# Altium PCB Copy of PCB1.PcbDoc
Units mm, origin at the board's own origin, x right, y up, seen from the top; angles counter-clockwise.
Board outline 50.75 x 50.5 mm, 4 copper layers (Top Layer, GND_t, GND_b, Bottom Layer), stack 0.442 mm thick; 80 components, 55 nets, 305 pads, 9 vias.
Unrouted connection lines stored in the file: 97.
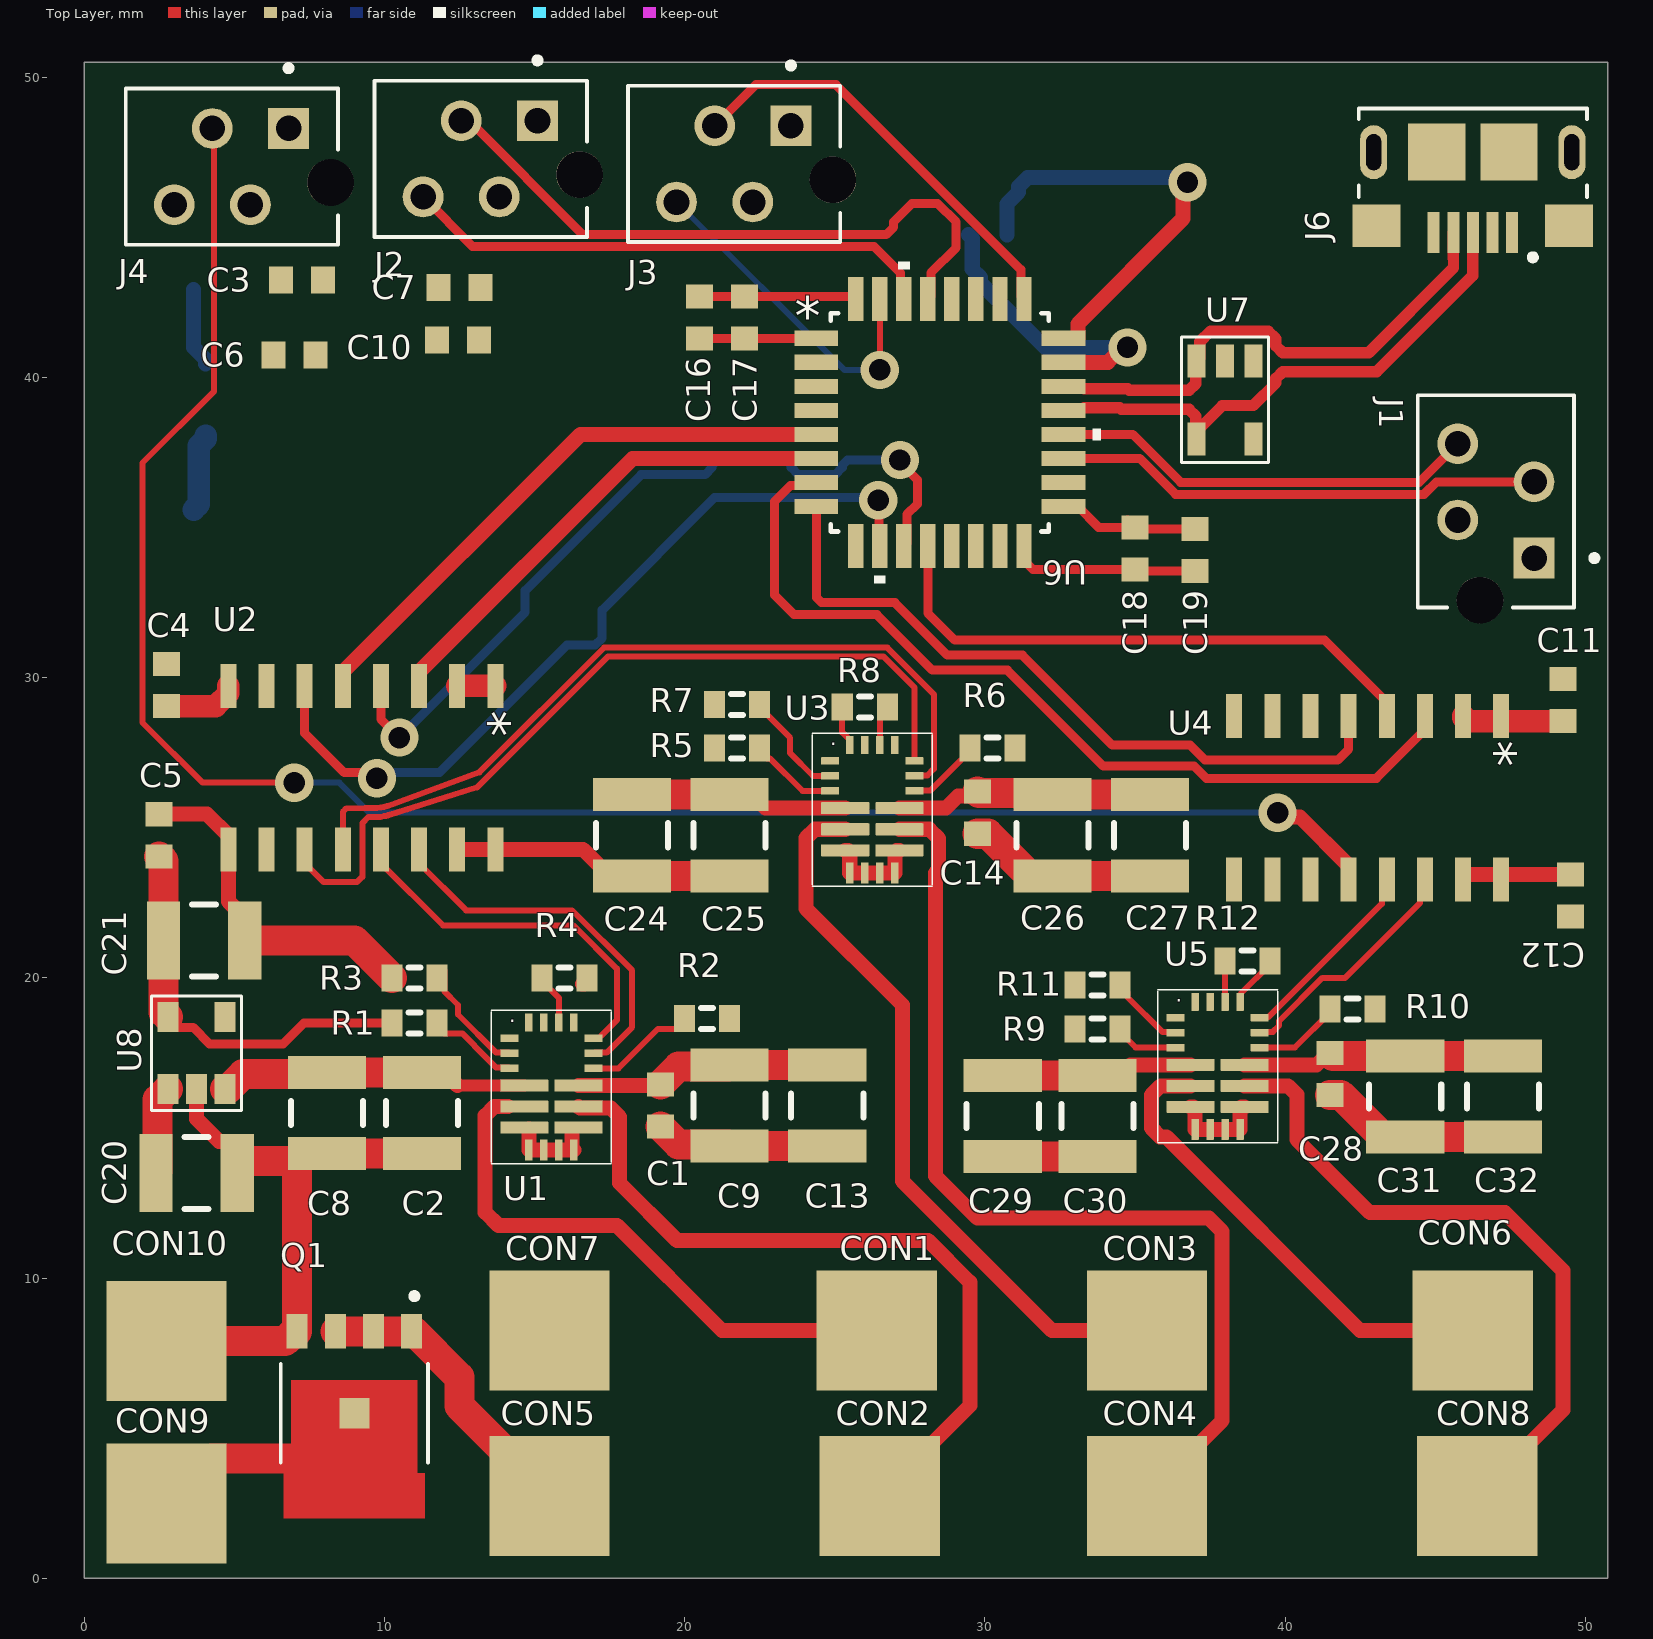
[diagram p0: Top Layer view]
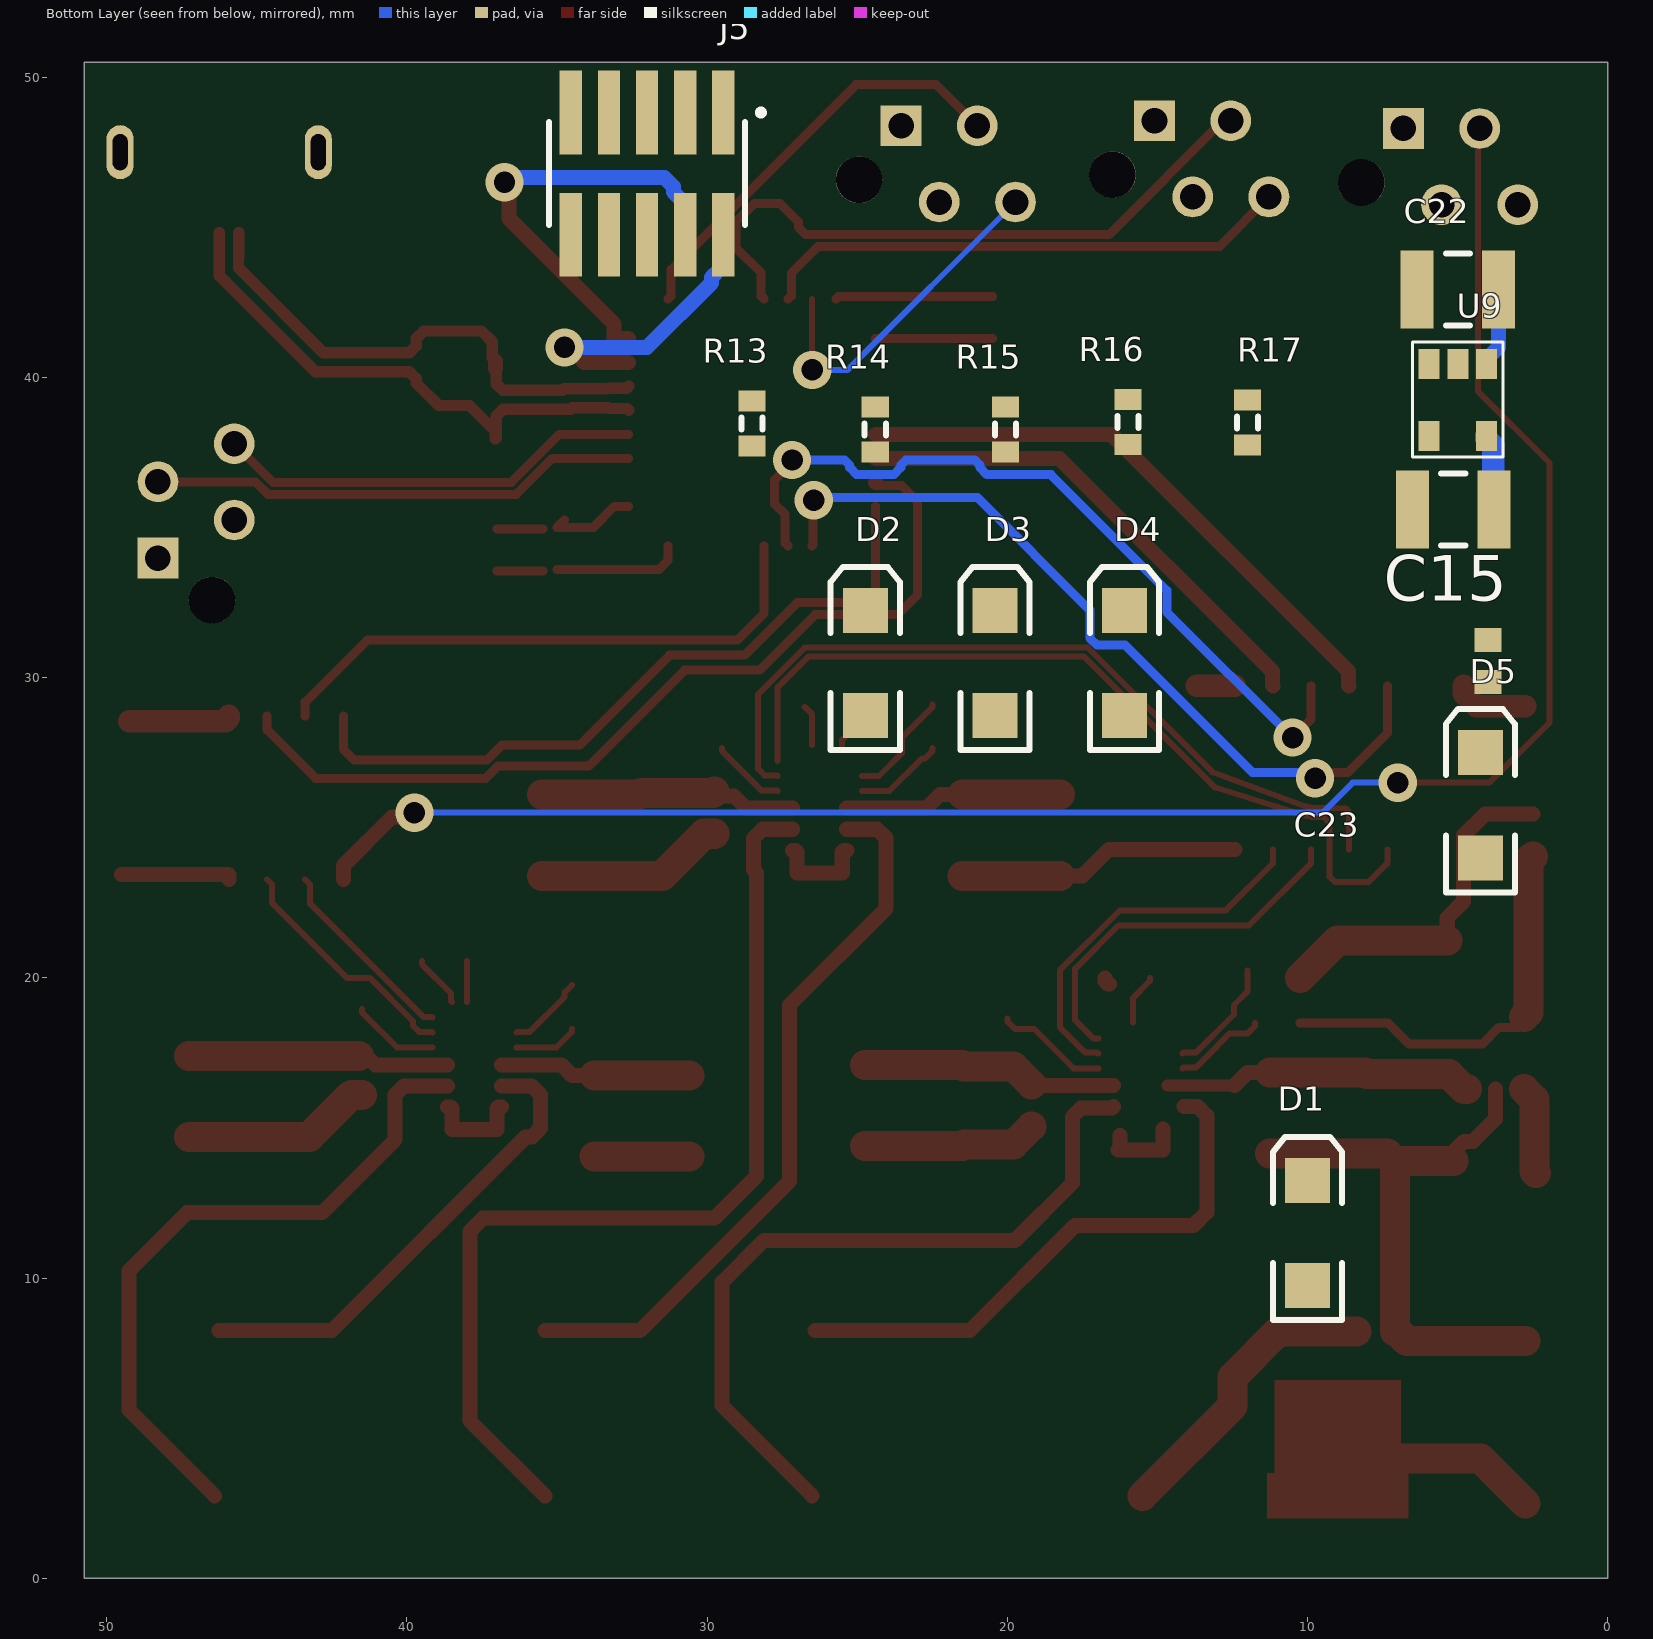
[diagram p1: Bottom Layer view, seen from below]

## Layer stack, top to bottom
Top Solder: solder mask 0.0102, Solder Resist, Dk 3.5
Top Layer: signal copper 0.035
Dielectric 2: prepreg 0.1, PP-006, Dk 4.1
GND_t: signal copper 0.035
Dielectric 1: core 0.1016, Core-009, Dk 4.5
GND_b: signal copper 0.035
Dielectric 3: prepreg 0.1, PP-006, Dk 4.1
Bottom Layer: signal copper 0.035
Bottom Solder: solder mask 0.0102, Solder Resist, Dk 3.5

## Board outline
0,0 50.75,0 50.75,50.5 0,50.5

## Design rules (kind name [scope] priority, off if disabled: settings)
Clearance [All] p1: gap=0.254 ignorepadtopadclearanceinfootprint=FALSE except(0: Arc-Hole Track-Hole SMDPad-Hole THPad-Hole Via-Hole Fill-Hole Poly-Hole Region-Hole Text-Hole; 0.1: Arc-Arc Arc-Track Track-Track; 0.127: SMDPad-SMDPad)
DiffPairsRouting [All] p1: maxlimit=0.254 minlimit=0.254 mostfreqgap=0.254 toplayer_minwidth=0.381 toplayer_maxwidth=0.381 toplayer_prefwidth=0.381 midlayer1_minwidth=0.381 midlayer1_maxwidth=0.381 midlayer1_prefwidth=0.381 midlayer2_minwidth=0.381 midlayer2_maxwidth=0.381 midlayer2_prefwidth=0.381 bottomlayer_minwidth=0.381 bottomlayer_maxwidth=0.381 bottomlayer_prefwidth=0.381 maxuncoupledlength=12.7
PolygonConnect [All] p1: connectstyle=Relief reliefconductorwidth=0.254 reliefentries=4 polygonreliefangle="90 Angle" airgapwidth=0.254
RoutingVias [All] p1: holewidth=0.711 width=1.27 viastyle="Through Hole" minholewidth=0.711 minwidth=1.27 maxholewidth=0.711 maxwidth=1.27
SolderMaskExpansion [All] p1: expansion=0.102 istentingtop=FALSE
Width [All] p1: maxlimit=1 minlimit=0.1 preferedwidth=0.254
29 further rules are at their usual default settings.

## Classes and differential pairs
differential pair class diff_USB: USB_D
component class Motorcontroller: C1 C2 C3 C4 C5 C6 C7 C8 C9 C10 C11 C12 C13 C14 C24 C25 C26 C27 C28 C29 C30 C31 C32 CON1 CON2 CON3 CON4 CON5 CON6 CON7 CON8 J1 J2 J3 J4 R1 R2 R3 R4 R5 R6 R7 R8 R9 R10 R11 R12 U1 U2 U3 U4 U5
component class Mainboard: C15 C16 C17 C18 C19 C20 C21 C22 C23 CON9 CON10 D1 D2 D3 D4 D5 J5 J6 Q1 R13 R14 R15 R16 R17 U6 U7 U8 U9
differential pair USB_D: +USB_D_P -USB_D_N

## Components (designator, comment, footprint, x,y, rotation, side; value= is the part's Value field where it differs from the comment)
C1 "Cap Semi" 1608[0603] 19.196,15.75 r90 top value=100nF
C2 "Cap Semi" C1210 11.25,15.5 r90 top value=10uF
C3 "Cap Semi" 1608[0603] 7.25,43.25 r0 top value=100nF
C4 "Cap Semi" 1608[0603] 2.75,29.75 r90 top value=100nF
C5 "Cap Semi" 1608[0603] 2.5,24.75 r270 top value=100nF
C6 "Cap Semi" 1608[0603] 7,40.75 r0 top value=100nF
C7 "Cap Semi" 1608[0603] 12.5,43 r0 top value=100nF
C8 "Cap Semi" C1210 8.096,15.5 r90 top value=10uF
C9 "Cap Semi" C1210 21.5,15.75 r90 top value=10uF
C10 "Cap Semi" 1608[0603] 12.45,41.25 r180 top value=100nF
C11 "Cap Semi" 1608[0603] 49.25,29.25 r90 top value=100nF
C12 "Cap Semi" 1608[0603] 49.5,22.75 r270 top value=100nF
C13 "Cap Semi" C1210 24.75,15.75 r90 top value=10uF
C14 "Cap Semi" 1608[0603] 29.75,25.5 r90 top value=100nF
C15 "Cap Semi" 1608[0603] 4,30.554 r90 bottom value=100pF
C16 "Cap Semi" 1608[0603] 20.5,42 r270 top value=1uF
C17 "Cap Semi" 1608[0603] 22,42 r270 top value=10nF
C18 "Cap Semi" 1608[0603] 35,34.3 r90 top value=100nF
C19 "Cap Semi" 1608[0603] 37,34.25 r90 top value=100nF
C20 "Cap Semi" C1210 3.75,13.5 r180 top value=10uF
C21 "Cap Semi" C1210 4,21.25 r180 top value=10uF
C22 "Cap Semi" C1210 5,42.929 r180 bottom value=10uF
C23 "Cap Semi" C1210 5.15,35.596 r180 bottom value=10uF
C24 "Cap Semi" C1210 18.25,24.75 r90 top value=10uF
C25 "Cap Semi" C1210 21.5,24.75 r90 top value=10uF
C26 "Cap Semi" C1210 32.25,24.75 r90 top value=10uF
C27 "Cap Semi" C1210 35.5,24.75 r90 top value=10uF
C28 "Cap Semi" 1608[0603] 41.5,16.805 r90 top value=100nF
C29 "Cap Semi" C1210 30.596,15.4 r90 top value=10uF
C30 "Cap Semi" C1210 33.75,15.4 r90 top value=10uF
C31 "Cap Semi" C1210 44,16.055 r90 top value=10uF
C32 "Cap Semi" C1210 47.25,16.055 r90 top value=10uF
CON1 "Moter1 +" con_soldering 26.5,8.25 r0 top
CON2 "Motor1 -" con_soldering 26.6,2.75 r0 top
CON3 "Motor2 +" con_soldering 35.5,8.25 r0 top
CON4 "Motor2 -" con_soldering 35.5,2.75 r0 top
CON5 "Thrower +" con_soldering 15.6,2.75 r0 top
CON6 "Motor3 +" con_soldering 46.35,8.25 r0 top
CON7 "Thrower -" con_soldering 15.6,8.25 r0 top
CON8 "Motor3 -" con_soldering 46.5,2.75 r0 top
CON9 "BAT+" con_soldering 2.85,2.5 r0 top
CON10 "BAT-" con_soldering 2.75,8 r90 top
D1 "RED" 3.2X1.6X1.1 10,11.5 r90 bottom
D2 "RED" 3.2X1.6X1.1 24.733,30.485 r90 bottom
D3 "RED" 3.2X1.6X1.1 20.415,30.485 r90 bottom
D4 "RED" 3.2X1.6X1.1 16.097,30.485 r90 bottom
D5 "RED" 3.2X1.6X1.1 4.25,25.75 r90 bottom
J1 "Encoder_1" TE_7-215079-4 48.29,33.98 r270 top
J2 "Encoder_2" TE_7-215079-4 15.1,48.55 r0 top
J3 "Encoder_3" TE_7-215079-4 23.54,48.38 r0 top
J4 "PWM_thrower" TE_7-215079-4 6.81,48.29 r0 top
J5 "FTSH-105-XX-X-DV" SAMTEC_FTSH-105-XX-X-DV 32,46.785 r0 bottom
J6 "10118193-0001LF" FCI_10118193-0001LF 46.25,47.5 r180 top
Q1 "BUK6Y10-30P" TRANS_PSMN5R5-60YS,115 9,5.5 r270 top
R1 "Res3" J1-0603 11,18.5 r180 top value=10K
R2 "Res3" J1-0603 20.75,18.654 r0 top value=10K
R3 "Res3" J1-0603 11,20 r180 top value=3.3K
R4 "Res3" J1-0603 16,20 r0 top value=100K
R5 "Res3" J1-0603 21.75,27.654 r180 top value=10K
R6 "Res3" J1-0603 30.25,27.654 r0 top value=10K
R7 "Res3" J1-0603 21.75,29.109 r180 top value=3.3K
R8 "Res3" J1-0603 26,29.029 r180 top value=100K
R9 "Res3" J1-0603 33.75,18.305 r180 top value=10K
R10 "Res3" J1-0603 42.25,18.959 r0 top value=10K
R11 "Res3" J1-0603 33.75,19.759 r180 top value=3.3K
R12 "Res3" J1-0603 38.75,20.555 r0 top value=100K
R13 "Res3" J1-0603 28.5,38.465 r90 bottom value=15K
R14 "Res3" J1-0603 24.401,38.267 r90 bottom value=15K
R15 "Res3" J1-0603 20.063,38.267 r90 bottom value=3.9K
R16 "Res3" J1-0603 15.975,38.517 r90 bottom value=3.9K
R17 "Res3" J1-0603 12,38.5 r90 bottom value=2.2K
U1 "PDRV8243HRXYQ1" DRV8243_motor_driver 15.563,16.364 r0 top
U2 "MAX14930AASE+" 21-0041_S16+1_MXM 9.25,27 r270 top
U3 "PDRV8243HRXYQ1" DRV8243_motor_driver 26.25,25.6 r0 top
U4 "MAX14930AASE+" 21-0041_S16+1_MXM 42.75,26 r270 top
U5 "PDRV8243HRXYQ1" DRV8243_motor_driver 37.75,17.055 r0 top
U6 "STM32G441KBT6" LQFP-32 28.5,38.5 r0 top
U7 "CM1223_ESD" CM1223_ESD 38,39.25 r180 top
U8 "NCV8730" NCP164CSN330T1G_Voltage_regulator 3.75,17.5 r180 top
U9 "NCP164" NCP164CSN330T1G_Voltage_regulator 5,39.25 r180 bottom

## Footprints (in the part's own frame and the unit in brackets; to place one, negate y for a bottom-side part, rotate by r counter-clockwise, add the part's x,y. Pads: shape width x height; smd on the part's side, far side on the other; paste and mask are expansions set on the pad)
3.2X1.6X1.1 [mm] "SMT LED; 2 Flat Leads"
  rect 1.5x1.5 smd: 1(-1.75,0) 2(1.75,0)
  silkscreen extent -2.9,-1.15 3.2,1.15
21-0041_S16+1_MXM [mm]
  rect 1.456x0.533 smd paste+0 mask+0: 1(-2.722,4.445) 2(-2.722,3.175) 3(-2.722,1.905) 4(-2.722,0.635) 5(-2.722,-0.635) 6(-2.722,-1.905) 7(-2.722,-3.175) 8(-2.722,-4.445) 9(2.722,-4.445) 10(2.722,-3.175) 11(2.722,-1.905) 12(2.722,-0.635) 13(2.722,0.635) 14(2.722,1.905) 15(2.722,3.175) 16(2.722,4.445)
  body extent -3.1,-4.95 3.1,4.95, height 1.76
1608[0603] [mm] "Chip Capacitor, Body 1.6x0.8mm, IPC High Density"
  rect 0.8x0.9 smd: 1(-0.7,0) 2(0.7,0)
  body extent -0.87,-0.48 0.87,0.48, height 1.3
C1210 [mm] "Chip Capacitor, Body 3.2x2.5mm, IPC High Density"
  rect 1.1x2.6 smd: 1(-1.35,0) 2(1.35,0)
  silkscreen extent -0.4,-1.2 0.4,1.2, body extent -1.7,-1.35 1.7,1.35, height 1.3
CM1223_ESD [mm]
  rect 0.6x1.1 smd: 1(-0.95,-1.3) 2(0,-1.3) 3(0.95,-1.3) 4(0.95,1.3) 5(-0.95,1.3)
  silkscreen extent -1.45,-2.1 1.45,2.08
con_soldering [mm]
  rect 4x4 smd: 1(-0.1,0)
DRV8243_motor_driver [mm]
  rrect10% 0.6x0.25 smd: 1(-1.4,1.625) 2(-1.4,1.125) 3(-1.4,0.625) 8(1.4,0.625) 9(1.4,1.125) 10(1.4,1.625)
  rrect10% 1.6x0.4 smd: 4(-0.9,0.05) 4(0.9,0.05) 5(-0.9,-0.65) 6(-0.9,-1.35) 6(0.9,-1.35) 7(0.9,-0.65)
  rrect10% 0.25x0.7 smd: 6(-0.75,-2.1) 6(-0.25,-2.1) 6(0.25,-2.1) 6(0.75,-2.1)
  rrect10% 0.25x0.6 smd: 11(0.75,2.15) 12(0.25,2.15) 13(-0.25,2.15) 14(-0.75,2.15)
  silkscreen extent -2,-2.55 2,2.55
FCI_10118193-0001LF [mm]
  rect 0.4x1.35 smd: 1(-1.3,2.675) 2(-0.65,2.675) 3(0,2.675) 4(0.65,2.675) 5(1.3,2.675)
  rect 1.6x1.4 smd: S1(-3.2,2.45) S2(3.2,2.45)
  rect 1.9x1.9 smd: S3(1.2,0) S4(-1.2,0)
  oval 0.9x1.8 hole 0.5 slot 1.2 at 90 deg: S5(-3.3,0) S6(3.3,0)
  round 0.5 hole 0.5 unplated: ""(-3.3,0) ""(3.3,0)
  silkscreen extent -3.8,-1.45 3.8,3.6
J1-0603 [mm] "Chip Resistor, Body 1.6x0.8mm, IPC High Density"
  rect 0.7x0.9 smd: 1(-0.75,0) 2(0.75,0)
  silkscreen extent -0.2,-0.35 0.2,0.35, body extent -0.85,-0.48 0.85,0.48, height 0.9
LQFP-32 [mm]
  rect 1.462x0.507 smd paste+0 mask+0: 1(-4.115,2.8) 2(-4.115,2) 3(-4.115,1.2) 4(-4.115,0.4) 5(-4.115,-0.4) 6(-4.115,-1.2) 7(-4.115,-2) 8(-4.115,-2.8) 17(4.115,-2.8) 18(4.115,-2) 19(4.115,-1.2) 20(4.115,-0.4) 21(4.115,0.4) 22(4.115,1.2) 23(4.115,2) 24(4.115,2.8)
  rect 0.507x1.462 smd paste+0 mask+0: 9(-2.8,-4.115) 10(-2,-4.115) 11(-1.2,-4.115) 12(-0.4,-4.115) 13(0.4,-4.115) 14(1.2,-4.115) 15(2,-4.115) 16(2.8,-4.115) 25(2.8,4.115) 26(2,4.115) 27(1.2,4.115) 28(0.4,4.115) 29(-0.4,4.115) 30(-1.2,4.115) 31(-2,4.115) 32(-2.8,4.115)
  silkscreen extent -3.63,-5.35 5.35,5.35, body extent -4.5,-4.5 4.5,4.5, height 1.6
NCP164CSN330T1G_Voltage_regulator [mm] "For NCP164CSN330T1G_Voltage_regulator and for NCV8730"
  rect 0.7x1 smd: 1(0.95,1.2) 2(0,1.2) 3(-0.95,1.2) 4(-0.95,-1.2) 5(0.95,-1.2)
  silkscreen extent -1.5,-1.9 1.5,1.92
SAMTEC_FTSH-105-XX-X-DV [mm]
  rect 0.74x2.79 smd: 01(-2.54,-2.035) 02(-2.54,2.035) 03(-1.27,-2.035) 04(-1.27,2.035) 05(0,-2.035) 06(0,2.035) 07(1.27,-2.035) 08(1.27,2.035) 09(2.54,-2.035) 10(2.54,2.035)
  silkscreen extent -3.89,-2.13 3.26,1.72, body extent -3.05,-3.06 3.3,3.06, height 2.92
TE_7-215079-4 [mm]
  rect 1.358x1.358 hole 0.85: 1(0,0)
  round 1.358 hole 0.85: 2(-1.27,-2.54) 3(-2.54,0) 4(-3.81,-2.54)
  round 1.55 hole 1.55 unplated: ""(1.4,-1.8)
  silkscreen extent -5.43,-3.87 1.65,2.11
TRANS_PSMN5R5-60YS,115 [mm]
  rect 1x1 smd paste-1 mask+0: D(0,0)
  rect 1.15x0.7 smd paste-2 mask+0: G(-2.725,-1.905) S(-2.725,1.905) S(-2.725,-0.635) S(-2.725,0.635)
  Top Layer region: 3.5,-2.35 2,-2.35 2,-2.1 -1.1,-2.1 -1.1,2.1 2,2.1 2,2.35 3.5,2.35
  silkscreen extent -4,-2.45 1.65,2.45, body extent -3,-2.45 3,2.45, height 1.2

## Part data
C1 C2 C3 C4 C5 C6 C7 C8 C9 C10 C11 C12 C13 C14 C15 C16 C17 C18 C19 C20 C21 C22 C23 C24 C25 C26 C27 C28 C29 C30 C31 C32: "Capacitor (Semiconductor SIM Model)", LatestRevisionDate=29-May-2009, LatestRevisionNote="IPC-7351 Footprint Added.", PackageDescription="Chip Capacitor", PackageReference=C1206, Published=8-Jun-2000, Publisher="Altium Limited"
CON1 CON2 CON3 CON4 CON5 CON6 CON7 CON8 CON9 CON10: library part Con_soldering
D1 D2 D3 D4 D5: library part LED2, "Typical RED, GREEN, YELLOW, AMBER GaAs LED", LatestRevisionDate=17-Jul-2002, LatestRevisionNote="Re-released for DXP Platform.", PackageDescription="SM LED; 2 Flat Leads", PackageReference=3.2X1.6X1.1, PackageVersion=Feb-2002, Published=8-Jun-2000, Publisher="Altium Limited"
J1 J2 J3 J4: library part Con_4_encoder, "Micro-MaTch 4 Position 1.27 mm Pitch Vertical Female-on-Board Connector", Package=SMD-6, Availability=Unavailable, MF="TE Connectivity", MP=7-215079-4, Price=None, SnapEDA_Link=https://www.snapeda.com/parts/7-215079-4/TE%20Connectivity%20AMP%20Connectors/view-part/453401/?ref=snap
J5: "Connector Header Surface Mount 10 position 0.050\" (1.27mm)", Package=None, Availability=Unavailable, MP=FTSH-105-XX-X-DV, Price=None
J6: "USB - micro B USB 2.0 Receptacle Connector 5 Position Surface Mount, Right Angle; Through Hole", Package=None, Availability=Unavailable, MF="Amphenol ICC", MP=10118193-0001LF, Price=None, SnapEDA_Link=https://www.snapeda.com/parts/10118193-0001LF/Amphenol%20FCI/view-part/2758989/?ref=snap
R1 R2 R3 R4 R5 R6 R7 R8 R9 R10 R11 R12 R13 R14 R15 R16 R17: "Resistor", LatestRevisionDate=29-May-2009, LatestRevisionNote="IPC-7351 Footprint Added.", PackageDescription="Chip Resistor", PackageReference=J1-0603, Published=8-Jun-2000, Publisher="Altium Limited"
U2 U4: "No Description Available", Mfr_Name="Maxim Integrated Products", Copyright="Copyright (C) 2021 Ultra Librarian. All rights reserved.", Manufacturer_Part_Number=MAX14930AASE+, RefDes=RefDes, Type=DEV
U6: "No Description Available", Mfr_Name=STMicroelectronics, Copyright="Copyright (C) 2021 Ultra Librarian. All rights reserved.", Digi-Key_Part_Number_1=STM32G441KBT6-ND, Manufacturer_Part_Number=STM32G441KBT6, RefDes=RefDes, Type=DEV

## Via types
v1: diameter 1.27, hole 0.711, Top Layer to Bottom Layer, 9 vias

## Nets (pads, with @x,y where several pads share a name; then routed paths per layer and width w, separated by ;. In a path a pad name is that pad's centre, name@x,y a point inside that pad or via, vN(x,y) a via of type N, cw(c..) or ccw(c..) an arc to the next point about the centre after c; other vN are vias at no path point)
+3.3V: C3.2 C4.2 C6.2 C7.2 C11.2 C16.2 C17.2 C18.2 C19.2 C23.2 D5.1 J1.2 J2.2 J3.2 J5.01 U6.1 U6.15 U6.17 U9.5 | length 11.1
  Top Layer w0.3: C16.2 C17.2 U6.1 ; U6.17 33.092,35.7 33.792,35 C18.2 C18.2@34.75,35.25 ; 35.47,34.95 C19.2
  Bottom Layer w0.75: C23.2@3.65,35.596 3.825,35.771 3.825,37.725 4.05,37.95 U9.5
+5V: C15.2 C22.2 D4.1 J6.1 J6.2 U7.5 U9.1 | length 2.6
  Bottom Layer w0.5: C22.2 3.65,40.993 3.943,40.7 3.95,40.7 4.05,40.6 U9.1
+5V_P: C5.2 C10.2 C12.2 C21.2 D3.1 J4.2 R1.2 R5.2 R9.2 U8.5 U9.3 | length 13.7
  Top Layer w0.3: U8.5 2.8,18.55 3,18.35 3.629,18.35 4.183,17.796 6.62,17.796 7.324,18.5 R1.2
  Top Layer w1: C5.2 2.65,23.9 C21.2 2.65,18.85 U8.5
+16V: C1.2 C2.2 C8.2 C9.2 C13.2 C14.2 C20.2 C24.2 C25.2 C26.2 C27.2 C28.2 C29.2 C30.2 C31.2 C32.2 CON5.1 D2.1 Q1.S U1.4 U3.4 U5.4 U8.1 U8.3 | length 62.9
  Top Layer w0.4: C2.2@12.436,16.414 U1.4@14.663,16.414
  Top Layer w0.5: C2.2 12,16.85 C2.2@12.436,16.414 ; U1.4@16.463,16.414 19.16,16.414 C1.2 ; C25.2 22.25,26.1 22.7,25.65 U3.4@25.35,25.65 ; U3.4@27.15,25.65 28.7,25.65 29.1,26.05 29.6,26.05 C14.2 ; C30.2 34.5,16.75 34.854,17.105 U5.4@36.85,17.105 ; U5.4@38.65,17.105 41.05,17.105 41.35,17.405 C28.2@41.6,17.405
  Top Layer w1: C20.2 2.45,13.55 2.45,15.95 U8.1 ; U8.3 4.796,16.3 5.296,16.8 8.046,16.8 C8.2 C2.2 ; Q1.S@8.365,8.225 9.635,8.225 10.905,8.225 10.98,8.225 12.5,6.705 12.5,5.75 CON5.1 ; C24.2 C25.2 ; C1.2 19.796,17.05 21.45,17.05 C9.2 C13.2 ; C14.2 29.8,26.15 32.2,26.15 C26.2 C27.2 ; C29.2 C30.2 ; C28.2@41.6,17.405 C31.2 C32.2
BAT+: CON9.1 D1.1 Q1.D | length 8.1
  Top Layer w0.254: 8.636,4.12 8.636,5.136 Q1.D
  Top Layer w1: CON9.1 4.25,4 8.516,4 8.636,4.12
GND: C3.1 C4.1 C6.1 C7.1 C11.1 C15.1 C16.1 C17.1 C18.1 C19.1 C22.1 C23.1 J1.1 J2.1 J3.1 J4.1 J5.05 J5.07 J5.09 J6.5 J6.S1 J6.S2 J6.S3 J6.S4 J6.S5 J6.S6 R16.1 R17.1 U2.1 U2.2 U2.8 U4.1 U4.2 U4.8 U6.14 U6.16 U6.32 U7.2 U9.2 | length 18.2
  Top Layer w0.3: C16.1 C17.1 25.615,42.7 U6.32 ; U6.16 31.3,33.908 31.608,33.6 C18.1 ; 35.47,33.55 C19.1
  Top Layer w0.75: C4.1 4.377,29.05 4.805,29.478 U2.8 ; U2.2 U2.1 ; U4.2 45.925,28.659 46.034,28.55 C11.1
NetCON1_1: CON1.1 U1.5 | length 18.8
  Top Layer w0.5: U1.5@14.113,15.714 13.662,15.714 13.359,15.411 13.359,12.191 13.8,11.75 17.75,11.75 21.25,8.25 CON1.1
NetCON2_1: CON2.1 U1.7 | length 25.1
  Top Layer w0.5: U1.7 16.513,15.664 17.543,15.664 17.836,15.371 17.836,13.164 19.75,11.25 28.113,11.25 29.5,9.863 29.5,5.75 CON2.1
NetCON3_1: CON3.1 U3.5 | length 24.4
  Top Layer w0.5: U3.5 24.339,24.95 24.046,24.657 24.046,22.306 27.25,19.102 27.25,13.239 32.239,8.25 CON3.1
NetCON4_1: CON4.1 U3.7 | length 32.9
  Top Layer w0.5: U3.7 28.151,24.95 28.454,24.647 28.454,23.603 28.351,23.5 28.351,13.399 29.75,12 37.457,12 37.904,11.553 37.904,5.254 CON4.1
NetCON6_1: CON6.1 U5.5 | length 16
  Top Layer w0.5: U5.5 35.847,16.405 35.546,16.104 35.546,14.997 35.839,14.704 36.046,14.704 42.5,8.25 CON6.1
NetCON8_1: CON8.1 U5.7 | length 22.7
  Top Layer w0.5: U5.7 40.095,16.405 40.388,16.112 40.388,14.612 42.819,12.181 47.319,12.181 49.25,10.25 49.25,5.6 CON8.1
NetD1_2: D1.2 R13.2
NetD2_2: D2.2 R14.2
NetD3_2: D3.2 R15.2
NetD4_2: D4.2 R16.2
NetD5_2: D5.2 R17.2
NetJ1_3: J1.3 U6.19 | length 16.3
  Top Layer w0.3: U6.19 35.157,37.3 36.357,36.1 44.626,36.1 45.046,36.52 J1.3
NetJ1_4: J1.4 U6.20 | length 14.3
  Top Layer w0.3: U6.20 34.923,38.1 36.523,36.5 44.46,36.5 J1.4
NetJ2_3: J2.3 U6.29 | length 21.8
  Top Layer w0.3: J2.3 12.822,48.55 16.615,44.757 26.714,44.757 26.961,45.004 26.961,45.18 27.57,45.789 28.43,45.789 29.039,45.18 29.039,44.32 28.204,43.484 28.204,42.718 U6.29
NetJ2_4: J2.4 U6.30 | length 17.9
  Top Layer w0.3: J2.4 12.943,44.357 26.314,44.357 27.196,43.474 27.196,42.718 U6.30
NetJ3_3: J3.3 U6.25 | length 14.3
  Top Layer w0.3: J3.3 22.37,49.75 25.035,49.75 31.196,43.589 31.196,42.718 U6.25
NetJ3_4: J3.4 U6.31 | length 11.5
  Top Layer w0.2: v1(26.5,40.25) U6.31
  Bottom Layer w0.2: J3.4 25.32,40.25 v1(26.5,40.25)
NetR1_1: R1.1 U1.3 | length 3.1
  Top Layer w0.2: R1.1 11.75,18.4 12,18.15 12.6,18.15 13,17.75 13,17.734 13.724,17.01 14.142,17.01 U1.3
NetR2_1: R2.1 U1.8 | length 3.8
  Top Layer w0.2: U1.8 17.799,16.989 19.114,18.304 19.75,18.304 20,18.554 R2.1
NetR3_1: R3.1 U1.2 | length 3.9
  Top Layer w0.2: R3.1@12,20.25 12,19.551 12.454,19.097 12.454,18.78 13.724,17.51 14.142,17.51 U1.2
NetR4_1: R4.1 U1.12 | length 1.7
  Top Layer w0.2: R4.1 15.25,19.9 15.813,19.337 U1.12
NetR5_1: R5.1 U3.3 | length 3
  Top Layer w0.2: R5.1 22.5,27.554 22.75,27.304 22.85,27.304 23.929,26.225 U3.3
NetR6_1: R6.1 U3.8 | length 2.5
  Top Layer w0.2: U3.8 27.671,26.246 28.192,26.246 29.5,27.554 R6.1
NetR7_1: R7.1 U3.2 | length 3.7
  Top Layer w0.2: R7.1 22.5,29.009 23.513,27.996 23.513,27.487 24.275,26.725 U3.2
NetR8_1: R8.1 U3.12 | length 1.4
  Top Layer w0.2: U3.12 26.5,28.779 R8.1
NetR9_1: R9.1 U5.3 | length 2.2
  Top Layer w0.2: R9.1 34.5,18.205 35.025,17.68 U5.3
NetR10_1: R10.1 U5.8 | length 2.9
  Top Layer w0.2: U5.8 40.321,17.68 41.5,18.859 R10.1
NetR11_1: R11.1 U5.2 | length 2.6
  Top Layer w0.2: R11.1 34.75,19.509 34.75,19.361 35.911,18.201 36.329,18.201 U5.2
NetR12_1: R12.1 U5.12 | length 1.4
  Top Layer w0.2: U5.12 R12.1
NetU2_3: U2.3 U6.6 | length 16.6
  Top Layer w0.5: U2.3 11.171,29.738 11.171,30.2 18.271,37.3 U6.6
NetU2_4: U2.4 U6.11 | length 26.9
  Top Layer w0.3: U2.4 9.885,28.619 10.5,28.004 v1(10.5,28) ; v1(27.168,37.25) 27.168,37.171 27.75,36.589 27.75,35.781 27.404,35.434 27.404,34.489 U6.11
  Top Layer w0.5: v1@10.353,28.147 v1(10.5,28)
  Bottom Layer w0.3: v1(10.5,28) 14.685,32.185 14.685,32.895 18.554,36.763 20.68,36.763 20.917,37 20.917,37.074 21.093,37.25 23.371,37.25 23.547,37.074 23.547,37 23.784,36.763 25.018,36.763 25.255,37 25.255,37.074 25.431,37.25 v1(27.168,37.25)
NetU2_5: U2.5 U6.5 | length 19.5
  Top Layer w0.5: U2.5 8.631,29.738 8.631,30.2 16.531,38.1 U6.5
NetU2_6: U2.6 U6.10 | length 27.3
  Top Layer w0.3: U2.6 7.345,28.155 8.665,26.835 9.564,26.835 v1(9.75,26.649) ; v1(26.45,35.906) 26.475,35.881 26.475,34.41 U6.10
  Bottom Layer w0.3: v1(9.75,26.649) 9.936,26.835 11.835,26.835 16.081,31.081 17.014,31.081 17.251,31.318 17.251,32.251 21,36 26.356,36 v1(26.45,35.906)
NetU4_3: U4.3 U6.7 | length 30.1
  Top Layer w0.3: U6.7@24.382,36.496 24.282,36.396 23.526,36.396 23,35.871 23,32.75 23.65,32.1 26.4,32.1 28.25,30.25 30.75,30.25 33.946,27.054 36.967,27.054 37.204,26.817 37.378,26.644 43.038,26.644 44.655,28.26 U4.3
  Top Layer w0.5: U6.7@24.382,36.496 U6.7
NetU4_4: U4.4 U6.12 | length 19.2
  Top Layer w0.3: U6.12 28.1,32.15 29,31.25 41.319,31.25 43.385,29.184 U4.4
NetU4_5: U4.5 U6.8 | length 24.3
  Top Layer w0.3: U6.8 24.385,32.676 24.561,32.5 27,32.5 28.75,30.75 31.25,30.75 34.25,27.75 36.837,27.75 37.337,27.25 41.75,27.25 42.115,27.615 U4.5
NRES: J5.10 U6.4
PGND: C1.1 C2.1 C5.1 C8.1 C9.1 C10.1 C12.1 C13.1 C14.1 C20.1 C21.1 C24.1 C25.1 C26.1 C27.1 C28.1 C29.1 C30.1 C31.1 C32.1 CON7.1 CON10.1 Q1.G R2.2 R3.2 R4.2 R6.2 R7.2 R8.2 R10.2 R11.2 R12.2 R13.1 R14.1 R15.1 U1.6 U1.11 U1.14 U2.9 U2.15 U2.16 U3.6 U3.11 U3.14 U4.9 U4.15 U4.16 U5.6 U5.11 U5.14 U8.2 | length 78.7
  Top Layer w0.2: R8.2 25.25,28.175 25.5,27.925 U3.14 ; U5.11 38.525,19.23 38.525,19.48 39.5,20.455 R12.2
  Top Layer w0.5: C5.1 4.095,25.45 4.805,24.74 U2.9 4.805,22.545 5.35,22 C21.1 ; U8.2 3.75,15.299 4.499,14.55 4.8,14.55 5.15,14.2 C20.1@5.15,13.899 ; U2.15 U2.16 16.622,24.278 17.5,23.4 C24.1 ; U1.6@14.813,14.964 14.813,14.264 15.313,14.264 15.813,14.264 16.313,14.264 16.25,14.327 16.25,14.75 ; R4.2@16.606,19.8 16.65,19.8 16.75,19.9 R4.2 ; U3.6@25.35,24.25 25.45,24.25 25.5,24.2 25.5,23.5 26,23.5 26.5,23.5 27,23.5 27,24.2 27.05,24.25 U3.6@27.15,24.25 ; U5.6@36.85,15.705 36.95,15.705 37,15.655 37,14.955 37.5,14.955 38,14.955 38.5,14.955 38.5,15.655 38.55,15.705 U5.6@38.65,15.705 ; U4.15 45.925,23.434 45.941,23.45 C12.1
  Top Layer w1: CON10.1 6.695,7.9 7.02,8.225 Q1.G C8.1@7.095,13.899 ; C20.1@5.15,13.899 C8.1@7.095,13.899 ; C21.1 9,21.25 R3.2 ; C2.1 C8.1 7.346,14.15 C8.1@7.095,13.899 ; C24.1 C25.1 ; C1.1 19.796,14.45 21.45,14.45 C9.1 C13.1 ; C14.1 30.1,24.8 31.5,23.4 C26.1 C27.1 ; C29.1 C30.1 ; C28.1 41.85,16.105 43.25,14.705 C31.1 C32.1
PWM_D_M1_P: U1.10 U2.13 | length 12.5
  Top Layer w0.2: U2.13 9.885,23.816 11.951,21.75 16.301,21.75 17.741,20.31 17.741,19.259 17.75,19.25 17.75,18.601 17.138,17.989 U1.10
PWM_D_M2_P: U2.11 U3.10 | length 27.8
  Top Layer w0.2: U2.11 7.345,23.816 7.965,23.196 9.094,23.196 9.265,23.367 9.265,25.153 9.472,25.36 9.874,25.36 9.996,25.384 ccw(c9.75,26.649) 10.127,25.416 10.16,25.427 13.087,26.347 17.441,30.7 26.626,30.7 27.65,29.676 U3.10
PWM_D_M3_P: U4.13 U5.10 | length 6.5
  Top Layer w0.2: U5.10 39.175,18.705 39.455,18.705 43.219,22.469 43.219,23.112 U4.13
PWM_M1_P: U1.9 U2.14 | length 12.6
  Top Layer w0.2: U2.14 11.155,23.816 12.721,22.25 16.25,22.25 18.25,20.25 18.25,18.358 17.402,17.51 17.01,17.51 16.989,17.489 U1.9
PWM_M2_P: U2.12 U3.9 | length 26.8
  Top Layer w0.2: U2.12 8.615,25.532 8.688,25.605 8.732,25.649 9.348,25.66 9.75,25.66 ccw(c9.75,26.649) 10.09,25.72 13.162,26.846 17.317,31 26.75,31 28.304,29.446 28.304,26.961 28.089,26.746 27.671,26.746 U3.9
PWM_M3_P: U4.14 U5.9 | length 8.1
  Top Layer w0.2: U5.9 39.171,18.201 39.589,18.201 39.804,18.415 39.804,18.563 41.241,20 42,20 44.489,22.489 44.489,23.112 U4.14
PWM_thrower_P: J4.3 U4.12 | length 63.6
  Top Layer w0.2: J4.3@4.329,48.5 4.329,39.537 1.946,37.153 1.946,28.503 3.949,26.5 v1(7,26.5)
  Top Layer w0.5: v1(39.75,25.5) 39.897,25.353 40.502,25.353 42.115,23.74 U4.12
  Bottom Layer w0.2: v1(7,26.5) 8.5,26.5 9.5,25.5 v1(39.75,25.5)
SWCLK: J5.04 U6.24 | length 14.8
  Top Layer w0.5: U6.24 33.092,41.3 33.096,41.304 33.096,41.781 36.603,45.288 36.603,46.353 v1(36.75,46.5)
  Bottom Layer w0.5: J5.04 30.73,45.775 31.126,46.171 31.126,46.354 31.421,46.649 36.393,46.649 36.542,46.5 v1(36.75,46.5)
SWDIO: J5.02 U6.23 | length 9.9
  Top Layer w0.5: U6.23 34.096,40.5 34.596,41 v1(34.75,41)
  Bottom Layer w0.5: J5.02 29.58,44.63 29.58,43.605 29.856,43.329 29.856,43.146 32.002,41 v1(34.75,41)
USB_D_N: J6.3 U6.21 U7.4 | length 18.4
  Top Layer w0.381: U6.21 32.678,38.963 33.282,38.963 33.301,38.982 34.49,38.982 34.54,38.933 36.801,38.933 37.025,38.709 37.025,37.975 U7.4 37.05,38.2 37.913,39.063 38.941,39.063 39.695,39.816 39.695,39.964 39.918,40.188 43.045,40.188 46.242,43.385 46.242,43.964 46.244,43.966 46.244,44.819 J6.3
USB_D_P: J6.4 U6.22 U7.3 | length 17.4
  Top Layer w0.381: U6.22 32.678,39.637 33.282,39.637 33.301,39.617 34.753,39.617 34.803,39.568 36.801,39.568 37.025,39.791 37.025,40.275 U7.3@37.05,40.3 ; U7.3 37.159,40.659 37.159,41.188 37.516,41.545 39.434,41.545 39.695,41.284 39.695,41.046 39.918,40.823 42.782,40.823 45.607,43.648 45.607,43.964 45.605,43.966 45.605,44.819 J6.4
  Top Layer w0.5: U7.3@37.05,40.3 U7.3
pads on no net: J1. J2. J3. J4. J4.4 J5.03 J5.06 J5.08 J6. U1.1 U1.13 U2.7 U2.10 U3.1 U3.13 U4.6 U4.7 U4.10 U4.11 U5.1 U5.13 U6.2 U6.3 U6.9 U6.13 U6.18 U6.26 U6.27 U6.28 U7.1 U8.4 U9.4

## Text inside footprints (layer, text, board x,y; h text height)
J6: Mechanical 13 "PCB END" at 41.5,48.8 h0.41 r180
U2: Top Overlay "*" at 12.933,28.905 h1.27 r270
U4: Top Overlay "*" at 46.433,27.905 h1.27 r270
U6: Top Overlay "*" at 23.674,41.421 h1.27; Mechanical 13 "*" at 25.058,41.065 h1.27